# EAGLE board revB (EAGLE 5.11)
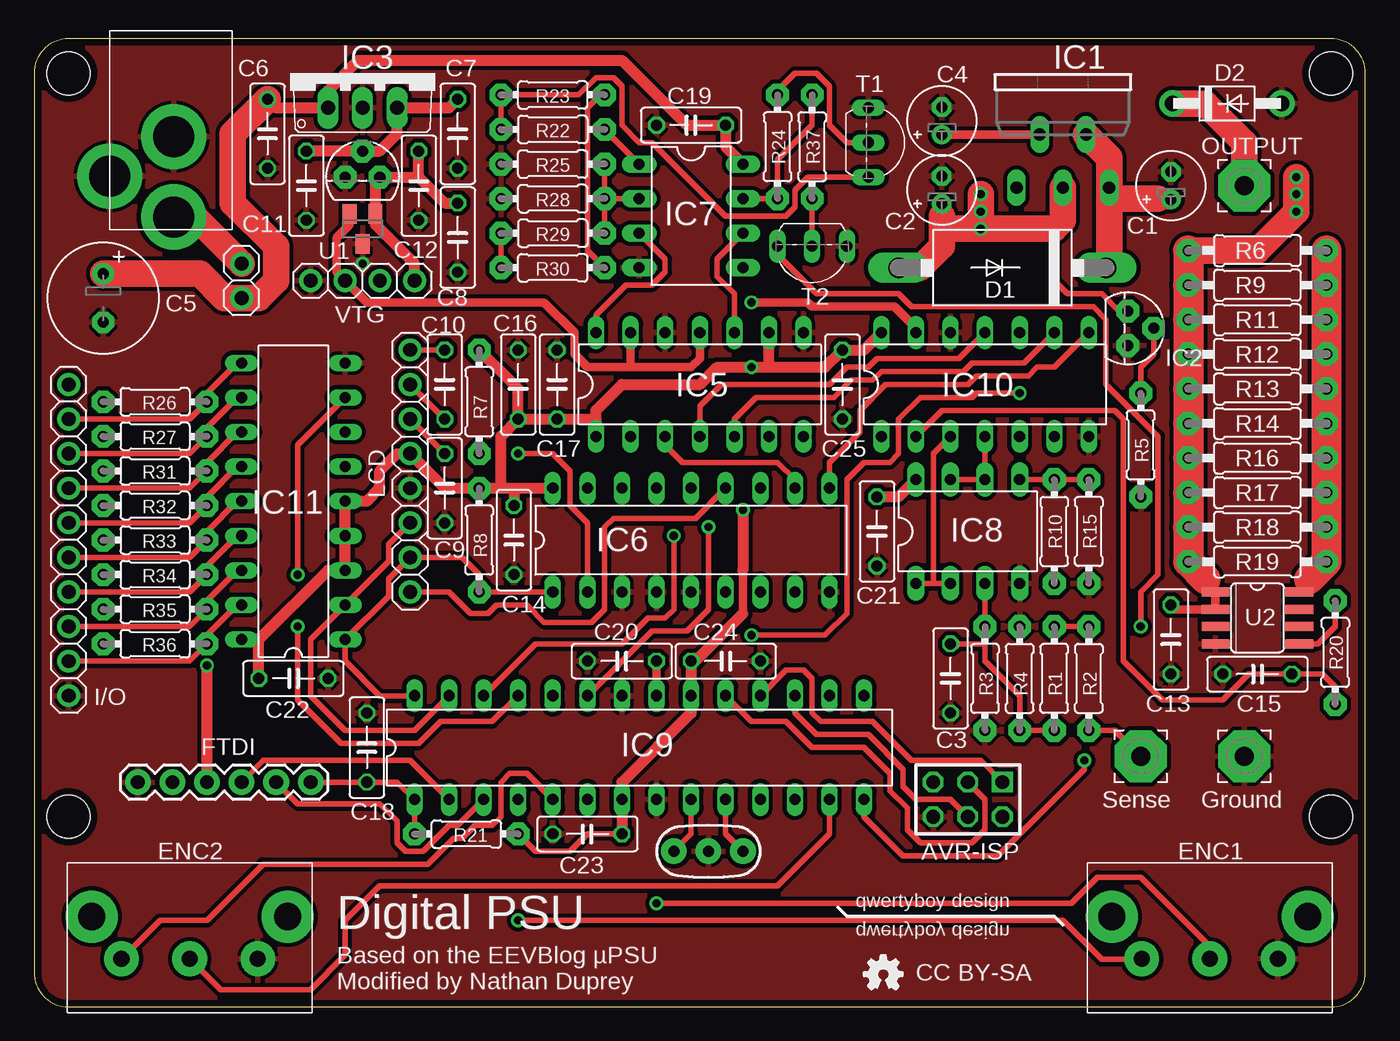
[diagram p0: board, top side]
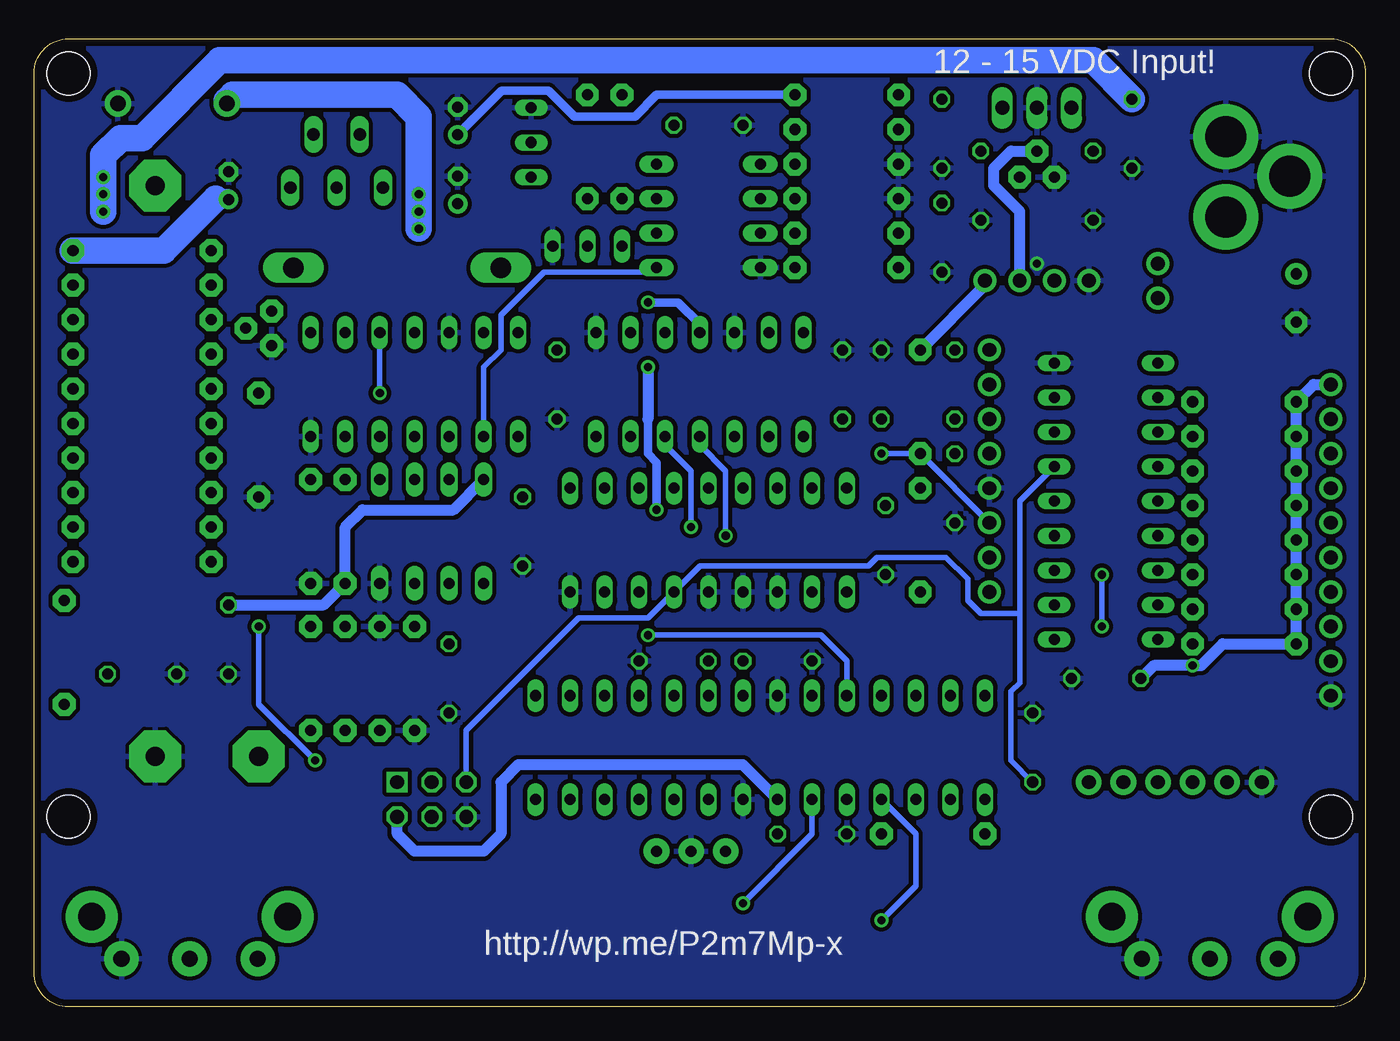
[diagram p1: board, bottom side, seen from below]

Size 97.79 x 71.12 mm. Coordinates in mm from the lower left corner, seen from the top.
Outline: 0,2.54 arc90 2.54,0 95.25,0 arc90 97.79,2.54 97.79,68.58 arc90 95.25,71.12 2.54,71.12 arc90 0,68.58 0,2.54
Copper layers (1*16): Top 0.0356mm / dielectric 1.5011mm / Bottom 0.0356mm
Design rules "batch_pcb": minimum track width 8mil, minimum drill 20mil, track to track 8mil, track to pad 8mil, pad to pad 8mil, via to via 8mil, smd to smd 8mil, copper to edge 20mil, drill to drill 8mil, minimum pad ring 7mil, minimum via ring 7mil, stop-mask expansion 4mil, vias tented up to drill 0mil, thermal gap 10mil
Holes 3.17 mm at 95.25,13.97 2.54,13.97 95.25,68.58 2.54,68.58

## Footprints (pad centres in the part's own frame; a part is rotated, then mirrored left to right if it is on the bottom)
AVR-ISP-6 = drill 1.016 square: 1 -2.54,-1.27 | drill 1.016 octagon: 2 -2.54,1.27; 3 0,-1.27; 4 0,1.27; 5 2.54,-1.27; 6 2.54,1.27
E2-5 = drill 0.813 pad 1.422 round: + -1.016,0 | drill 0.813 pad 1.422 octagon: - 1.016,0
C050-025X075 = drill 0.813 octagon: 1 -2.54,0; 2 2.54,0
E3,5-8 = drill 0.813 pad 1.6 round: + -1.778,0 | drill 0.813 pad 1.6 octagon: - 1.778,0
DO201-15 = drill 1.499 long: A 7.62,0; C -7.62,0
DO41-7 = drill 1.118 pad 1.93 round: A 4,0; C -4,0
VXXAX15 = drill 1.2 pad 2.54 round: A -5,-1.55; B 0,-1.55; C 5,-1.55 | drill 2 pad 3.81 round: P$4 7.2,1.55; P$5 -7.2,1.55
FTDI_BASIC = drill 1.016 pad 1.88 round: CTS 10.16,0; DTR 0,0; GND 12.7,0; RXI 2.54,0; TXO 5.08,0; VCC 7.62,0
1X10 = drill 1.016 pad 1.676 round: 1 -11.43,0; 2 -8.89,0; 3 -6.35,0; 4 -3.81,0; 5 -1.27,0; 6 1.27,0; 7 3.81,0; 8 6.35,0; 9 8.89,0; 10 11.43,0
TO220-51 = drill 0.9 long: 1 -3.4,-8.4; 2 -1.7,-4.5; 3 0,-8.4; 4 1.7,-4.5; 5 3.4,-8.4
TO92 = drill 0.813 pad 1.676 octagon: 1 -1.27,0; 2 0,1.905; 3 1.27,0
TO220V = drill 1.016 long: 1 -2.54,-2.54; 2 0,-2.54; 3 2.54,-2.54
DIL14 = drill 0.813 long: 1 -7.62,-3.81; 2 -5.08,-3.81; 3 -2.54,-3.81; 4 0,-3.81; 5 2.54,-3.81; 6 5.08,-3.81; 7 7.62,-3.81; 8 7.62,3.81; 9 5.08,3.81; 10 2.54,3.81; 11 0,3.81; 12 -2.54,3.81; 13 -5.08,3.81; 14 -7.62,3.81
DIL18 = drill 0.813 long: 1 -10.16,-3.81; 2 -7.62,-3.81; 3 -5.08,-3.81; 4 -2.54,-3.81; 5 0,-3.81; 6 2.54,-3.81; 7 5.08,-3.81; 8 7.62,-3.81; 9 10.16,-3.81; 10 10.16,3.81; 11 7.62,3.81; 12 5.08,3.81; 13 2.54,3.81; 14 0,3.81; 15 -2.54,3.81; 16 -5.08,3.81; 17 -7.62,3.81; 18 -10.16,3.81
DIL08 = drill 0.813 pad 1.27 long: 1 -3.81,-3.81; 2 -1.27,-3.81; 3 1.27,-3.81; 4 3.81,-3.81; 5 3.81,3.81; 6 1.27,3.81; 7 -1.27,3.81; 8 -3.81,3.81
DIL28-3 = drill 0.813 long: 1 -16.51,-3.81; 2 -13.97,-3.81; 3 -11.43,-3.81; 4 -8.89,-3.81; 5 -6.35,-3.81; 6 -3.81,-3.81; 7 -1.27,-3.81; 8 1.27,-3.81; 9 3.81,-3.81; 10 6.35,-3.81; 11 8.89,-3.81; 12 11.43,-3.81; 13 13.97,-3.81; 14 16.51,-3.81; 15 16.51,3.81; 16 13.97,3.81; 17 11.43,3.81; 18 8.89,3.81; 19 6.35,3.81; 20 3.81,3.81; 21 1.27,3.81; 22 -1.27,3.81; 23 -3.81,3.81; 24 -6.35,3.81; 25 -8.89,3.81; 26 -11.43,3.81; 27 -13.97,3.81; 28 -16.51,3.81
1X08 = drill 1.016 pad 1.676 round: 1 -8.89,0; 2 -6.35,0; 3 -3.81,0; 4 -1.27,0; 5 1.27,0; 6 3.81,0; 7 6.35,0; 8 8.89,0
3,81/1,4 = drill 1.397 pad 3.81 octagon: 1 0,0
1X02 = drill 1.016 pad 1.676 round: 1 -1.27,0; 2 1.27,0
0204/7 = drill 0.813 pad 1.676 octagon: 1 -3.81,0; 2 3.81,0
0207/10 = drill 0.813 pad 1.676 octagon: 1 -5.08,0; 2 5.08,0
TO92-EBC = drill 0.813 long: B 0,-1.27; C 2.54,-1.27; E -2.54,-1.27
SOT-23 = smd 1 x 1.4: 1 -0.95,-1.1; 2 0.95,-1.1; 3 0,1.1
SO08 = smd 0.66 x 2.032: 1 -1.905,-3.073; 2 -0.635,-3.073; 3 0.635,-3.073; 4 1.905,-3.073; 5 1.905,3.073; 6 0.635,3.073; 7 -0.635,3.073; 8 -1.905,3.073
PJ-102A = drill 3 pad 4.8 round: RING 0.1,-3.39; RING_SW -4.6,-6.29; TIP 0.1,-9.29
1X04 = drill 1.016 pad 1.676 round: 1 -3.81,0; 2 -1.27,0; 3 1.27,0; 4 3.81,0
RESONATOR-PTH = drill 0.8 pad 1.88 round: 1 -2.54,0; 2 0,0; 3 2.54,0

## Placement (x,y rotation side)
AVR-ISP  AVR-ISP-6  [AVR-ISP-6]  68.58,15.24 180 top
C1  10uF  [E2-5]  83.5,60.33 90 top
C2  10uF  [E2-5]  66.67,60.01 90 top
C3  .1uF  [C050-025X075]  67.31,24.13 270 top
C4  10uF  [E2-5]  66.67,65.09 90 top
C5  220uF  [E3,5-8]  5.08,52.07 270 top
C6  .1uF  [C050-025X075]  17.14,64.14 270 top
C7  .1uF  [C050-025X075]  31.11,64.14 270 top
C8  .1uF  [C050-025X075]  31.11,56.52 270 top
C9  1uF  [C050-025X075]  30.16,38.1 90 top
C10  1uF  [C050-025X075]  30.16,45.72 90 top
C11  .1uF  [C050-025X075]  20,60.33 270 top
C12  1uF  [C050-025X075]  28.26,60.33 270 top
C13  .1uF  [C050-025X075]  83.5,26.99 270 top
C14  .1uF  [C050-025X075]  35.24,34.29 270 top
C15  1uF  [C050-025X075]  89.85,24.45 0 top
C16  1uF  [C050-025X075]  35.56,45.72 270 top
C17  .1uF  [C050-025X075]  38.42,45.72 90 top
C18  .1uF  [C050-025X075]  24.45,19.05 270 top
C19  .1uF  [C050-025X075]  48.26,64.77 180 top
C20  .1uF  [C050-025X075]  43.18,25.4 180 top
C21  .1uF  [C050-025X075]  61.91,34.92 270 top
C22  .1uF  [C050-025X075]  19.05,24.13 0 top
C23  .1uF  [C050-025X075]  40.64,12.7 180 top
C24  .1uF  [C050-025X075]  50.8,25.4 0 top
C25  .1uF  [C050-025X075]  59.37,45.72 270 top
D1  1N5400  [DO201-15]  71.12,54.29 180 top
D2  SA12AG  [DO41-7]  87.63,66.36 0 top
ENC1  EN16VXXAX15  [VXXAX15]  86.36,5.08 0 top
ENC2  EN16VXXAX15  [VXXAX15]  11.43,5.08 0 top
FTDI  FTDI_BASICPTH  [FTDI_BASIC]  20.32,16.51 180 top
I/O  [1X10]  2.54,34.29 270 top
IC1  LT3080ET  [TO220-51]  75.56,68.58 0 top
IC2  LM334Z  [TO92]  80.33,49.85 270 top
IC3  7805TV  [TO220V]  24.13,68.58 0 top
IC4  MCP1700-3302E/TO  [TO92]  24.13,60.96 0 top
IC5  MCP4922-E/P  [DIL14]  48.9,45.72 0 top
IC6  MCP2300X/P  [DIL18]  48.26,34.29 0 top
IC7  TLC272BCP  [DIL08]  48.26,58.1 270 top
IC8  TLC272BCP  [DIL08]  68.58,34.92 0 top
IC9  MEGA8-P  [DIL28-3]  44.45,19.05 0 top
IC10  MCP3204-P  [DIL14]  69.85,45.72 0 top
IC11  MCP2300X/P  [DIL18]  19.05,37.15 90 top
LCD  [1X08]  27.62,39.37 90 top
OUTPUT  OUT+  [3,81/1,4]  88.9,60.33 0 top
PAD1  OUT-  [3,81/1,4]  88.9,18.41 0 top
PAD2  SENSE  [3,81/1,4]  81.28,18.41 90 top
PWR_SWITCH  [1X02]  15.24,53.34 270 top
R1  10K  [0204/7]  74.93,24.13 90 top
R2  10K  [0204/7]  77.47,24.13 270 top
R3  10K  [0204/7]  69.85,24.13 90 top
R4  10K  [0204/7]  72.39,24.13 270 top
R5  100R  [0204/7]  81.28,41.27 90 top
R6  [0207/10]  89.85,55.56 0 top
R7  10K  [0204/7]  32.7,44.45 90 top
R8  10K  [0204/7]  32.7,34.29 90 top
R9  [0207/10]  89.85,53.02 0 top
R10  49K9  [0204/7]  74.93,34.92 270 top
R11  [0207/10]  89.85,50.48 0 top
R12  [0207/10]  89.85,47.94 0 top
R13  [0207/10]  89.85,45.4 0 top
R14  [0207/10]  89.85,42.86 0 top
R15  10K  [0204/7]  77.47,34.92 90 top
R16  [0207/10]  89.85,40.32 0 top
R17  [0207/10]  89.85,37.78 0 top
R18  [0207/10]  89.85,35.24 0 top
R19  [0207/10]  89.85,32.7 0 top
R20  330R  [0204/7]  95.57,26.04 90 top
R21  10K  [0204/7]  31.75,12.7 0 top
R22  1K  [0204/7]  38.1,64.45 180 top
R23  100R  [0204/7]  38.1,66.99 0 top
R24  10K  [0204/7]  54.61,63.18 90 top
R25  10K  [0204/7]  38.1,61.91 0 top
R26  10K  [0204/7]  8.89,44.45 180 top
R27  10K  [0204/7]  8.89,41.91 180 top
R28  10K  [0204/7]  38.1,59.37 0 top
R29  10K  [0204/7]  38.1,56.83 180 top
R30  10K  [0204/7]  38.1,54.29 0 top
R31  10K  [0204/7]  8.89,39.37 180 top
R32  10K  [0204/7]  8.89,36.83 180 top
R33  10K  [0204/7]  8.89,34.29 180 top
R34  10K  [0204/7]  8.89,31.75 180 top
R35  10K  [0204/7]  8.89,29.21 180 top
R36  10K  [0204/7]  8.89,26.67 180 top
R37  10K  [0204/7]  57.15,63.18 270 top
T1  2N3904  [TO92-EBC]  62.55,63.5 270 top
T2  2N3904  [TO92-EBC]  57.15,54.61 180 top
U1  ISL21070  [SOT-23]  24.13,57.15 180 top
U2  MAX4080AUA+  [SO08]  89.85,28.57 270 top
U$1  2.1MMJACKTHM  [PJ-102A]  10.16,67.31 0 top
U$2  [QWERTYBOY_DESIGN_LOGO]  67.31,6.67 0 bottom
U$3  [OSHW_FILLX100_NOTEXT]  60.96,1.27 0 top
VTG  [1X04]  24.13,53.34 180 top
Y1  RESONATORPTH  [RESONATOR-PTH]  49.53,11.43 0 top

## Library data of the parts
AVR-ISP = avr-6
C1-C25 D2 IC4 IC6 IC11 R1-R37 U$1 = adafruit
D1 = diode
ENC1 ENC2 = rotary-encoder
FTDI Y1 = SparkFun
I/O LCD PWR_SWITCH VTG = pinhead
IC1-IC3 IC7 IC8 = linear
IC5 IC10 = microchip
IC9 = atmel; OC_FARNELL: unknown; OC_NEWARK: unknown
OUTPUT PAD1 PAD2 = wirepad
T1 T2 = transistor-neu-to92
U1 = intersil
U2 = maxim
U$2 U$3 = ohw-logo

## Nets
+3V3: AVR-ISP.2 C8.1 C12.1 C14.1 C16.2 C17.1 C22.1 C23.1 C24.1 C25.1 FTDI.VCC I/O.1 IC4.3 IC5.1 IC5.9 IC6.18 IC9.7 IC9.20 IC10.14 IC11.3 IC11.4 IC11.5 IC11.18 LCD.5 R7.2 R8.2 R21.2 R26.2 R27.2 R31.2 R32.2 R33.2 R34.2 R35.2 R36.2 U1.1 VTG.1
+5V: C7.1 C11.1 IC3.3 IC4.2 VTG.2
ADC-CS: IC6.10 IC10.8
ADC-DOUT: IC9.24 IC10.10
ADC-IOUT: C15.2 IC7.5 IC10.2 R20.1
ADC-IOUT200: IC10.1
ADC-VIN: IC8.5 R10.1 R15.2
ADC-VOUT: C3.1 IC8.3 R1.1 R3.2 R4.2
AREF: C20.1 IC9.21
CLIM: IC9.14 T2.C
DAC-CS: IC5.3 IC6.11
ENC1A: ENC1.A IC9.4
ENC1B: ENC1.B IC9.6
ENC2A: ENC2.A IC9.5
ENC2B: ENC2.B IC9.13
GND: AVR-ISP.6 C1.- C2.- C3.2 C4.- C5.- C6.2 C7.2 C8.2 C9.1 C11.2 C12.2 C13.2 C14.2 C15.1 C16.1 C17.2 C18.1 C19.2 C20.2 C21.2 C22.2 C23.2 C24.2 C25.2 D2.A ENC1.C ENC2.C FTDI.GND I/O.10 IC2.3 IC3.2 IC4.1 IC5.8 IC5.12 IC6.3 IC6.4 IC6.5 IC6.9 IC7.4 IC8.4 IC9.8 IC9.22 IC10.7 IC10.12 IC11.9 LCD.4 PAD1.1 R3.1 R4.1 R5.1 R15.1 R25.1 R28.1 T1.E T2.E U1.3 U2.4 U$1.RING U$1.RING_SW VTG.4 Y1.2
INPUT-INT: IC9.25 IC11.8
ISET: IC5.10 IC7.6
L-B: IC9.11
L-G: IC9.12
L-R: IC9.15
LCDRST: IC6.13 LCD.1
LT3080-SET: C4.+ IC1.2 R23.2 R30.2
LT3080_IN: C1.+ D1.C IC1.4 IC1.5 R6.2 R9.2 R11.2 R12.2 R13.2 R14.2 R16.2 R17.2 R18.2 R19.2 U2.8
MISO: AVR-ISP.1 IC9.18
MOSI: AVR-ISP.4 IC9.17
N$1: IC9.9 Y1.1
N$2: IC9.10 Y1.3
N$6: C10.2 LCD.8
N$7: C10.1 LCD.7
N$8: C9.2 LCD.6
N$9: R29.2 R30.1
N$10: C2.+ D1.A D2.C IC1.3 IC2.1 OUTPUT.1
N$11: R20.2 U2.5
N$12: IC7.2 R25.2 R28.2 R29.1
N$13: IC7.7 R24.1 R37.1
N$14: R37.2 T2.B
N$15: IC7.1 R22.1
N$16: R24.2 T1.B
N$17: R22.2 R23.1 T1.C
N$19: IC8.1 IC8.2 IC10.3
N$20: IC2.2 R5.2
N$21: IC8.6 IC8.7 IC10.4
N$29: PAD2.1 R2.2
N$30: R1.2 R2.1
PB1: I/O.2 IC11.10 R26.1
PB2: I/O.3 IC11.11 R27.1
PB3: I/O.4 IC11.12 R31.1
PB4: I/O.5 IC11.13 R32.1
PB5: I/O.6 IC11.14 R33.1
PB6: I/O.7 IC11.15 R34.1
PB7: I/O.8 IC11.16 R35.1
PB8: I/O.9 IC11.17 R36.1
RANGE: IC6.12
RESET: AVR-ISP.5 C18.2 FTDI.DTR IC6.6 IC9.1 IC11.6 R21.1
RXD: FTDI.TXO IC9.2
SCK: AVR-ISP.3 IC9.19
SCL: IC6.1 IC9.28 IC11.1 LCD.2 R8.1
SDA: IC6.2 IC9.27 IC11.2 LCD.3 R7.1
SPI-CLK: IC5.4 IC9.26 IC10.11
SPI-DIN: IC5.5 IC9.23 IC10.9
SS: IC9.16
TXD: FTDI.RXI IC9.3
V+: PWR_SWITCH.1 U$1.TIP
VCC: C5.+ C6.1 C13.1 C19.1 C21.1 IC3.1 IC7.8 IC8.8 PWR_SWITCH.2 R6.1 R9.1 R10.2 R11.1 R12.1 R13.1 R14.1 R16.1 R17.1 R18.1 R19.1 U2.1 U2.2
VREF: IC5.11 IC5.13 IC10.13 U1.2 VTG.3
VSET: IC5.14 IC7.3

## Tracks (layer width: path | path; a pad name or v marks a point on that pad's centre or on a via)
+3V3  (via drill 0.6 pad 1.02)
  Top 0.406: R21.2 36.83,11.43 39.37,11.43 40.64,12.7 C23.1
  Top 0.61: 52.07,32.07 52.07,28.89
  Top 0.813: 28.26,62.55 C12.1 28.26,60.96 | C8.1 30.16,59.05 28.26,60.96 | 28.26,60.96 IC4.3 25.08,60.64 U1.1 25.08,57.47 27.94,54.61 VTG.1 | C23.1 IC9.7 43.18,16.51 48.26,21.59 IC9.20 C24.1 48.58,25.4 52.07,28.89 | 16.51,26.99 21.59,32.07 IC11.3 IC11.4 IC11.5 24.45,37.15 25.4,38.1 25.4,39.37 26.67,40.64 LCD.5 30.16,38.1 R8.2 | 16.51,26.99 IC11.18 | C22.1 16.51,26.99 | C16.2 C17.1 41.27,43.18 | C16.2 35.56,45.4 R7.2 | R8.2 33.02,38.1 | C16.2 34.29,41.91 34.29,38.1 | 41.27,43.18 41.27,43.81 43.18,45.72 48.9,45.72 50.16,46.99 v52.7,46.99 53.98,46.99 | 41.27,43.18 IC5.1 | 35.24,38.1 IC6.18 | R8.2 34.29,38.1 | 35.24,38.1 C14.1 | 34.29,38.1 35.24,38.1 | IC10.14 60.96,48.26 C25.1 58.1,46.99 53.98,46.99 | 53.98,46.99 IC5.9 | FTDI.VCC v12.7,25.08 | v52.07,36.51 52.07,32.07
  Bottom 0.61: v52.07,36.51 52.07,40.01 52.7,40.64 52.7,43.18
  Bottom 0.813: I/O.1 3.81,45.72 R26.2 R27.2 R31.2 R32.2 R33.2 R34.2 R35.2 R36.2 10.48,26.67 12.06,25.08 v12.7,25.08 15.56,25.08 C22.1 | VTG.1 27.94,53.02 R7.2 | v52.7,46.99 52.7,43.18 | AVR-ISP.2 71.12,12.7 69.85,11.43 64.77,11.43 63.5,12.7 63.5,16.51 62.23,17.78 45.72,17.78 IC9.7
+5V
  Top 0.813: C7.1 30.48,66.04 IC3.3 26.67,64.14 25.4,62.87 IC4.2 C11.1
  Bottom 0.813: VTG.2 25.4,58.42 27.3,60.33 27.3,61.59 26.04,62.87 IC4.2
ADC-CS
  Top 0.406: IC10.8 74.93,46.99 73.66,46.99 73.03,46.35 69.22,46.35 68.58,45.72 62.55,45.72 60.64,43.81 60.64,42.23 58.42,40.01 IC6.10
ADC-DOUT  (via drill 0.6 pad 1.02)
  Top 0.406: v72.39,45.09 69.22,45.09 68.9,44.77 65.09,44.77 63.5,43.18 63.5,40.64 62.87,40.01 60.96,40.01 59.69,38.73 59.69,28.89 58.1,27.3 v52.7,27.3
  Bottom 0.406: v72.39,45.09 IC10.10 | v52.7,27.3 40.01,27.3 38.1,25.4 IC9.24
ADC-IOUT
  Top 0.406: R20.1 95.57,23.5 94.61,24.45 C15.2 89.22,24.45 87.31,22.54 82.87,22.54 80.01,25.4 80.01,43.18 79.38,43.81 66.67,43.81 IC10.2
  Bottom 0.406: IC7.5 52.39,53.98 60.33,53.98 63.5,50.8 63.5,48.26 64.77,46.99 IC10.2
ADC-VIN
  Top 0.406: IC8.5 R10.1 R15.2
ADC-VOUT
  Top 0.406: IC8.3 R3.2 69.85,26.67 | R1.1 R4.2 72.39,22.86 69.85,25.4 69.85,26.67 | C3.1 69.85,26.67
AREF
  Top 0.61: IC9.21 C20.1
CLIM  (via drill 0.6 pad 1.02)
  Top 0.406: T2.C 54.61,55.24 57.47,52.39 63.5,52.39 64.45,51.44 77.79,51.44 78.74,50.48 78.74,45.72 82.55,41.91 82.55,31.75 81.28,30.48 v81.28,27.94 | v77.15,18.1 77.15,17.46 70.8,11.11 63.82,11.11 60.96,13.97 IC9.14
  Bottom 0.406: v81.28,27.94 81.28,22.23 v77.15,18.1
DAC-CS
  Top 0.406: IC6.11 55.88,38.73 54.61,40.01 47.62,40.01 46.35,41.27 IC5.3
ENC1A  (via drill 0.6 pad 1.02)
  Top 0.406: v35.56,6.35 75.56,6.35 78.42,3.49 81.32,3.49 ENC1.A
  Bottom 0.406: IC9.4 33.02,12.7 33.02,8.89 v35.56,6.35
ENC1B  (via drill 0.6 pad 1.02)
  Top 0.406: ENC1.B 86.36,4.45 81.28,9.53 78.11,9.53 76.2,7.62 v45.72,7.62
  Bottom 0.406: IC9.6 40.64,12.7 v45.72,7.62
ENC2A
  Top 0.406: IC9.5 36.2,17.14 34.92,17.14 34.29,16.51 34.29,13.97 33.66,13.34 32.38,13.34 31.43,12.38 30.8,12.38 28.89,10.48 16.83,10.48 12.7,6.35 9.25,6.35 ENC2.A
ENC2B
  Top 0.406: IC9.13 58.42,12.7 54.61,8.89 25.4,8.89 22.86,6.35 22.86,3.81 20.32,1.27 13.69,1.27 ENC2.B
GND  (via drill 0.6 pad 1.02)
  other vias: 24.13,54.61
  pour Bottom (isolate 0.305): 97.79,71.12 0,71.12 0,0 97.79,0
  pour Top (isolate 0.305): 97.79,71.12 0,71.12 0,0 97.79,0
INPUT-INT  (via drill 0.6 pad 1.02)
  Top 0.406: IC9.25 33.66,20.95 29.84,20.95 28.26,19.37 22.54,19.37 19.37,22.54 v19.37,27.94 | v19.37,31.75 19.37,41.27 IC11.8
  Bottom 0.406: v19.37,27.94 v19.37,31.75
ISET
  Top 0.406: IC7.6 50.16,54.93 50.16,53.66 51.44,52.39 IC5.10
LCDRST
  Top 0.406: IC6.13 48.58,35.88 42.55,35.88 41.91,35.24 41.91,29.21 40.96,28.26 37.47,28.26 36.2,29.53 33.97,29.53 33.34,28.89 32.07,28.89 30.48,30.48 LCD.1
LT3080-SET
  Top 0.406: R23.2 41.59,66.99 40.64,66.04 40.64,55.56 R30.2
  Top 0.61: IC1.2 66.68,64.08 C4.+
  Bottom 0.61: R23.2 52.07,66.99 53.66,65.41 58.1,65.41 60.01,67.31 63.44,67.31 C4.+
LT3080_IN
  Top 0.61: 93.66,31.43 93.66,31.22 U2.8
  Top 1.422: C1.+ 82.61,59.31 82.55,59.37
  Top 1.93: IC1.4 78.97,62.38 IC1.5 78.97,59.69 | 78.97,59.69 78.97,54.52 D1.C | 82.55,59.37 79.28,59.37 78.97,59.69
  Top 2.184: R6.2 R9.2 R11.2 R12.2 R13.2 R14.2 R16.2 R17.2 R18.2 R19.2 93.66,31.43
  Bottom 1.422: 84.45,59.37 83.57,59.37 C1.+
  Bottom 1.93: R6.2 88.27,55.56 84.45,59.37
MISO
  Top 0.406: IC9.18 55.24,24.77 56.52,24.77 57.15,24.13 57.15,21.59 57.78,20.95 61.59,20.95 64.45,18.1 69.53,18.1 AVR-ISP.1
MOSI
  Top 0.406: IC9.17 55.88,21.59 57.47,20 61.28,20 63.82,17.46 63.82,16.19 64.77,15.24 67.31,15.24 AVR-ISP.4
N$1
  Top 0.406: IC9.9 48.26,12.7 Y1.1
N$2
  Top 0.406: IC9.10 50.8,12.7 Y1.3
N$6
  Top 0.406: LCD.8 C10.2
N$7
  Top 0.406: LCD.7 C10.1
N$8
  Top 0.406: LCD.6 C9.2
N$9
  Top 0.406: R30.1 R29.2
N$10  (via drill 0.6 pad 1.02)
  Top 0.406: IC2.1 79.69,51.12 78.42,52.39 75.88,52.39 74.93,53.34 74.93,57.15
  Top 1.422: 66.67,58.1 C2.+
  Top 1.93: D2.C 86.04,66.36 88.9,63.5 OUTPUT.1 | 66.67,57.15 66.67,58.1 | 66.67,57.15 66.67,55.88 65.09,54.29 D1.A | IC1.3 75.56,57.78 74.93,57.15 v69.53,57.15 | 66.67,57.15 v69.53,57.15 | v69.53,57.15 v69.53,58.42 v69.53,59.69
  Bottom 1.93: D2.C 83.63,66.55 83.19,66.99 71.12,66.99 69.53,65.41 v69.53,59.69 v69.53,58.42 v69.53,57.15
N$11
  Top 0.406: U2.5 94.3,26.67 95.57,27.94 R20.2
N$12
  Top 0.406: R29.1 R28.2 | R28.2 IC7.2 | R28.2 R25.2
N$13
  Top 0.406: IC7.7 R24.1 54.61,62.23 57.15,64.77 R37.1
N$14
  Top 0.406: T2.B R37.2
N$15
  Top 0.406: R22.1 IC7.1
N$16
  Top 0.406: R24.2 54.61,67.31 55.88,68.58 57.47,68.58 58.42,67.63 58.42,64.77 59.69,63.5 T1.B
N$17
  Top 0.406: R22.2 R23.1 40.01,66.99 41.27,68.26 42.55,68.26 43.18,67.63 43.18,64.77 44.45,63.5 45.4,63.5 50.8,58.1 55.24,58.1 55.88,58.74 55.88,60.01 56.83,60.96 T1.C
N$19
  Top 0.406: 66.04,31.11 IC8.2 | IC8.1 66.04,31.11 | IC10.3 66.04,40.64 66.04,31.11
N$20
  Top 0.406: IC2.2 82.23,47.94 81.28,46.99 R5.2
N$21
  Top 0.406: IC8.7 IC8.6 IC10.4
N$29
  Top 0.406: R2.2 79.38,20.32 PAD2.1
N$30
  Top 0.406: R1.2 R2.1
PB1
  Top 0.406: IC11.10 14.92,47.31 12.7,45.09 R26.1 11.43,43.18 I/O.2
PB2
  Top 0.406: IC11.11 14.92,44.77 12.7,42.55 R27.1 11.43,40.64 I/O.3
PB3
  Top 0.406: IC11.12 14.92,42.23 12.7,40.01 R31.1 11.43,38.1 I/O.4
PB4
  Top 0.406: IC11.13 14.92,39.69 12.7,37.47 R32.1 11.43,35.56 I/O.5
PB5
  Top 0.406: IC11.14 14.92,37.15 12.7,34.92 R33.1 11.43,33.02 I/O.6
PB6
  Top 0.406: IC11.15 14.92,34.61 12.7,32.38 R34.1 11.43,30.48 I/O.7
PB7
  Top 0.406: IC11.16 14.92,32.07 12.7,29.84 R35.1 11.43,27.94 I/O.8
PB8
  Top 0.406: IC11.17 14.92,29.53 12.7,27.3 R36.1 11.43,25.4 I/O.9
RESET
  Top 0.406: R21.1 IC9.1 26.67,16.51 C18.2 FTDI.DTR
  Bottom 0.406: IC11.6 25.4,37.15 25.4,28.89 | 25.4,28.89 25.4,23.81 26.04,23.18 26.04,18.1 C18.2 | 25.4,28.89 28.26,28.89 29.21,29.84 29.21,31.43 30.8,33.02 35.88,33.02 36.51,32.38 48.9,32.38 IC6.6 52.7,28.57 57.78,28.57 66.04,20.32 AVR-ISP.5
RXD
  Top 0.406: IC9.2 27.62,18.1 16.83,18.1 FTDI.TXO
SCK
  Top 0.406: IC9.19 52.7,20.95 55.24,20.95 57.15,19.05 60.96,19.05 62.87,17.14 62.87,15.88 64.14,14.61 64.14,13.02 65.09,12.06 68.9,12.06 69.85,13.02 69.85,15.24 AVR-ISP.3
SCL
  Top 0.406: IC6.1 R8.1 32.7,31.75 31.43,33.02 LCD.2 26.04,31.43 26.04,30.16 IC11.1 22.86,25.4 25.4,22.86 IC9.28
SDA  (via drill 0.6 pad 1.02)
  Top 0.406: LCD.3 26.04,33.97 26.04,32.7 IC11.2 20.32,26.99 20.32,22.86 22.86,20.32 27.94,20.32 IC9.27 | IC6.2 40.64,35.56 39.37,36.83 39.37,39.37 38.1,40.64 v35.56,40.64
  Bottom 0.406: LCD.3 R7.1 v35.56,40.64
SPI-CLK  (via drill 0.6 pad 1.02)
  Top 0.406: IC10.11 67.94,47.62 61.91,47.62 61.28,46.99 59.69,46.99 58.42,45.72 50.48,45.72 48.9,44.13 IC5.4 | v46.99,34.61 46.99,29.21 46.35,28.57 45.09,28.57 43.18,26.67 36.83,26.67 IC9.26
  Bottom 0.406: IC5.4 48.9,41.27 46.99,39.37 v46.99,34.61
SPI-DIN  (via drill 0.6 pad 1.02)
  Top 0.406: IC10.9 72.71,47.31 68.9,47.31 68.26,46.67 62.23,46.67 61.59,46.04 60.01,46.04 58.74,44.77 53.02,44.77 51.44,43.18 IC5.5 | v49.53,35.24 49.53,29.21 47.94,27.62 45.4,27.62 IC9.23
  Bottom 0.406: IC5.5 51.44,41.27 49.53,39.37 v49.53,35.24
TXD
  Top 0.406: IC9.3 31.11,13.34 30.48,13.34 28.57,11.43 27.3,11.43 26.67,12.06 26.67,13.65 25.4,14.92 19.37,14.92 FTDI.RXI
V+
  Top 1.93: U$1.TIP 11.83,58.02 PWR_SWITCH.1
VCC  (via drill 0.6 pad 1.02)
  Top 0.61: 86.04,31.43 86.04,31.22 U2.1 U2.2 83.82,29.21 C13.1
  Top 0.813: IC7.8 50.8,63.18 C19.1 47.94,64.77 43.18,69.53 23.81,69.53 21.59,67.31 IC3.1 17.78,66.04 C6.1 | C21.1 63.5,37.47 IC8.8
  Top 1.93: C5.+ 12.19,53.85 13.97,52.07 PWR_SWITCH.2 16.51,52.07 17.78,53.34 17.78,55.88 14.61,59.05 14.61,64.14 C6.1 | R6.1 89.85,55.56 v92.71,58.42 v92.71,59.69 v92.71,60.96
  Top 2.184: R6.1 R9.1 R11.1 R12.1 R13.1 R14.1 R16.1 R17.1 R18.1 R19.1 86.04,31.43
  Bottom 0.813: C13.1 76.52,29.53 R10.2 74.93,35.24 73.66,36.51 66.99,36.51 IC8.8
  Bottom 1.93: C6.1 20,69.53 84.14,69.53 89.85,63.82 91.44,63.82 92.71,62.55 v92.71,60.96 v92.71,59.69 v92.71,58.42
VREF  (via drill 0.6 pad 1.02)
  Top 0.61: U1.2 23.18,57.47 22.23,56.52 22.23,53.98 VTG.3 24.45,51.75 37.47,51.75 39.69,49.53 39.69,47.94 40.64,46.99 43.81,46.99 | IC5.11 48.9,47.62 48.26,46.99 43.81,46.99 | 43.81,46.99 IC5.13 | IC10.13 64.77,49.85 63.18,51.44 57.15,51.44 56.83,51.75 v52.7,51.75
  Bottom 0.61: v52.7,51.75 50.48,51.75 48.9,50.16 IC5.11
VSET
  Top 0.406: IC7.3 46.35,54.93 46.35,53.98 45.4,53.02 43.5,53.02 41.27,50.8 IC5.14

## Text on the board
tNames: Sense | Ground | Digital PSU | Based on the EEVBlog µPSU | CC BY-SA | Modified by Nathan Duprey
bNames: 12 - 15 VDC Input! | http://wp.me/P2m7Mp-x